# Altium PCB sx1278.PcbDoc
Units mil, origin at the board's own origin, x right, y up, seen from the top; angles counter-clockwise.
Board outline 1220 x 2120 mil, 2 copper layers (Top Layer, Bottom Layer); 24 components, 38 nets, 140 pads, 49 vias.
Unrouted connection lines stored in the file: 1.
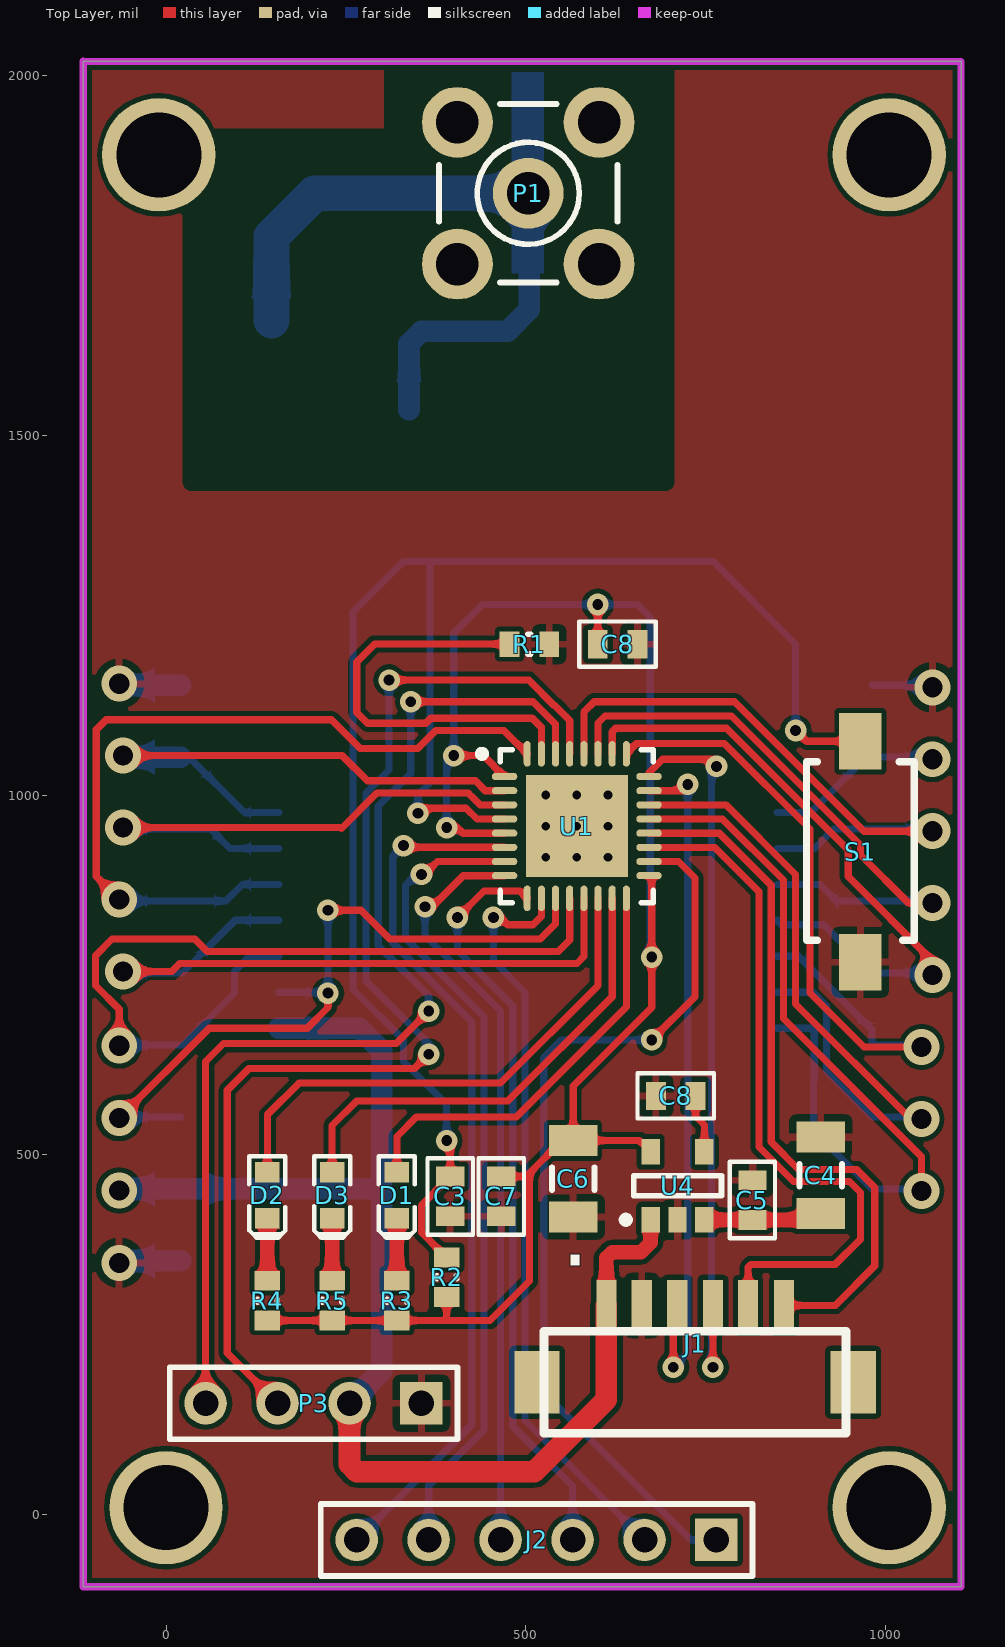
[diagram p0: Top Layer view]
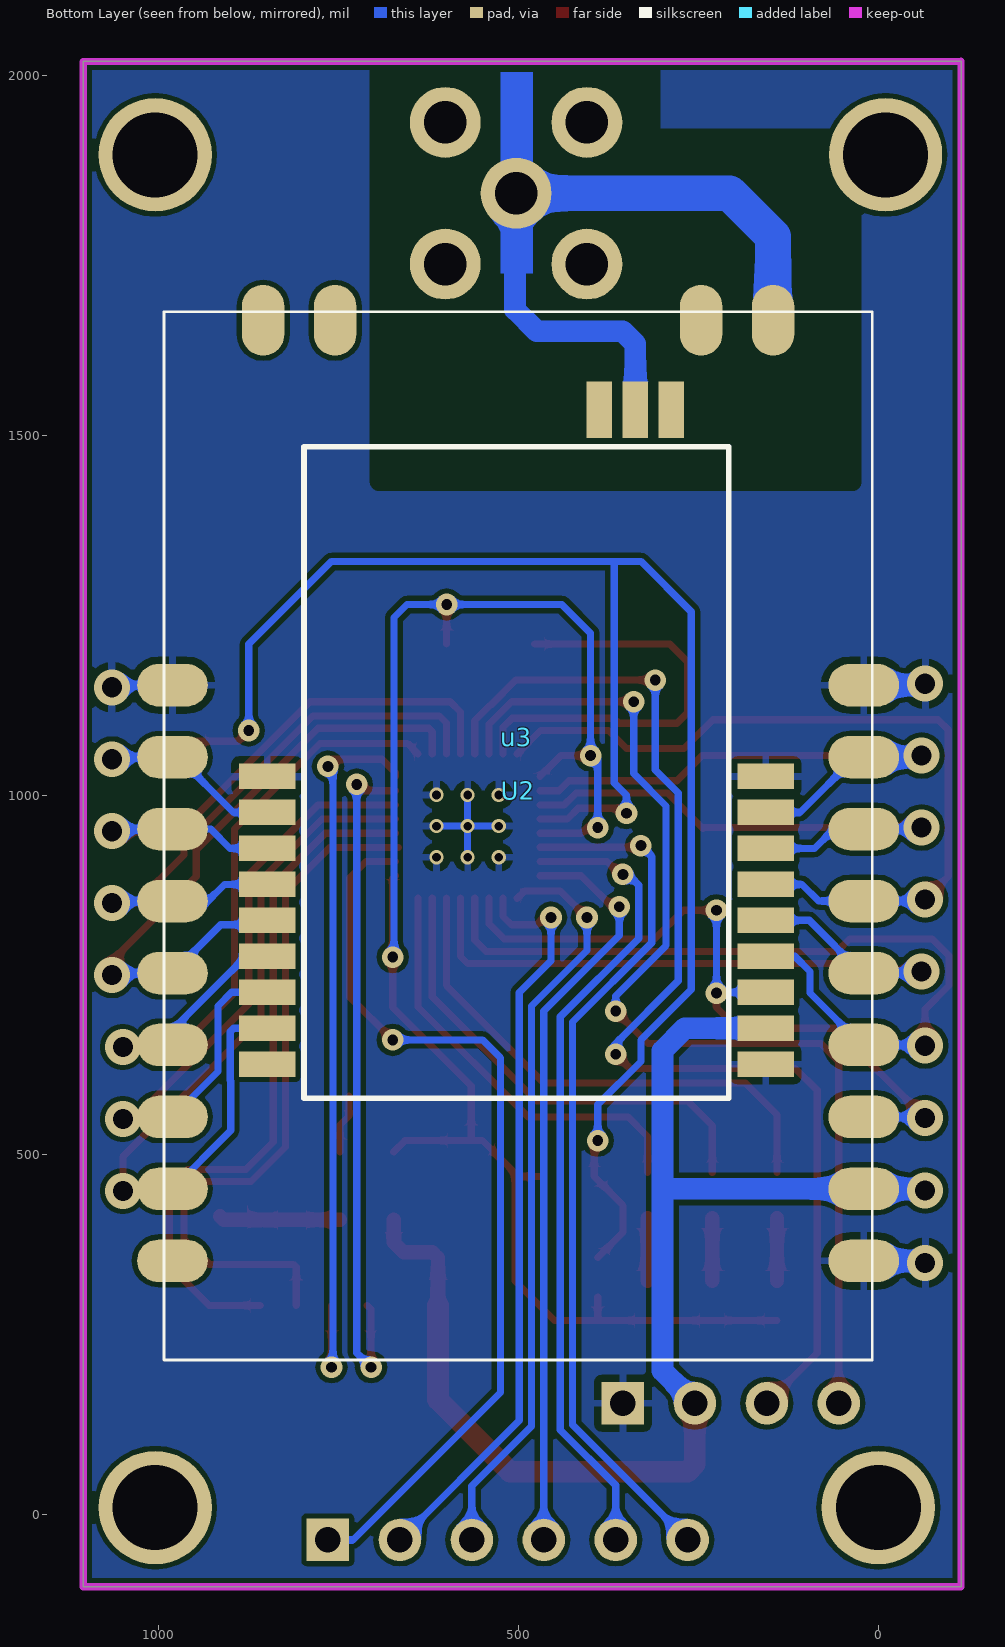
[diagram p1: Bottom Layer view, seen from below]

## Layer stack, top to bottom
Top Solder: solder mask 0.4, Solder Resist, Dk 3.5
Top Layer: signal copper 1.4
Dielectric1: dielectric 12.6, FR-4, Dk 4.8
Bottom Layer: signal copper 1.4
Bottom Solder: solder mask 0.4, Solder Resist, Dk 3.5

## Board outline
-115,-100 -115,2020 -114.69,2019.69 1105,2019.69 1105,-100

## Design rules (kind name [scope] priority, off if disabled: settings)
Clearance [All] p1: gap=7 ignorepadtopadclearanceinfootprint=FALSE
PolygonConnect [All] p1: connectstyle=Relief reliefconductorwidth=10 reliefentries=4 polygonreliefangle="90 Angle" airgapwidth=10
RoutingVias [All] p1: holewidth=28 width=50 viastyle="Through Hole" minholewidth=28 minwidth=50 maxholewidth=28 maxwidth=50
SilkToSolderMaskClearance SilkscreenOverComponentPads [IsPad] p1: minsilkscreentomaskgap=10 clearancetoexposedcopper=TRUE
SolderMaskExpansion [All] p1: expansion=4
Width [All] p1: maxlimit=50 minlimit=6 preferedwidth=10
29 further rules are at their usual default settings.

## Components (designator, comment, footprint, x,y, rotation, side; value= is the part's Value field where it differs from the comment)
C3 "Cap_0603" 0603AC 395,470 r270 top value=?F
C4 "Cap_0603" C1206 910,471.85 r270 top value=?F
C5 "Cap_0603" 0603AC 815,465 r270 top value=?F
C6 "Cap_0603" C1206 565.84,467.09 r90 top value=?F
C7 "Cap_0603" 0603AC 465.84,414.92 r90 top value=?F
C8 "Cap_0603" 0603AC 655.12,1210 r180 top value=?F
C8 "Cap_0603" 0603AC 680.72,582.09 r0 top value=?F
D1 "Status" LED_0603_BLUE 320.84,444.09 r270 top
D2 "PWR" LED_0603_GREEN 140.84,444.09 r270 top value="2.1v 20mA"
D3 "RX" LED_0603_YELLOW 230.84,444.09 r270 top value="2.1v 20mA"
J1 "CON6" DF13C-6P-1.25V 735,255 r0 top
J2 "CON6" HDR1X6 765,-35 r180 top
P1 "SMB" SMB_V-RJ45 503.43,1836.57 r0 top
P3 "HDR1x4_1.27" HDR1X4 355,155 r180 top
R1 "2R94 1% 0603(1608)" RESC0603(1608)_L 505,1210 r180 top value="2.94 Ohm"
R2 "2R94 1% 0603(1608)" RESC0603(1608)_L 390,330 r270 top value="2.94 Ohm"
R3 "2R94 1% 0603(1608)" RESC0603(1608)_L 320.84,297.64 r90 top value="2.94 Ohm"
R4 "2R94 1% 0603(1608)" RESC0603(1608)_L 140.84,297.64 r90 top value="2.94 Ohm"
R5 "2R94 1% 0603(1608)" RESC0603(1608)_L 230.84,297.64 r90 top value="2.94 Ohm"
S1 "ButtonTACT_3x6x2.5_180" 按键-贴片 965,1075 r270 top
U1 "STM32F050K6U6A" UFQFPN32_M 570.84,957.09 r0 top
U2 "sx1278" SPI-E19-433MS1W 500.67,943.46 r90 bottom locked
u3 "sx1278100mw" "PCBComponent_1 - duplicate" 510,1050 r90 bottom locked
U4 "LP2992-3.3" SOT23-5L 710.84,457.24 r90 top

## Footprints (in the part's own frame and the unit in brackets; to place one, negate y for a bottom-side part, rotate by r counter-clockwise, add the part's x,y. Pads: shape width x height; smd on the part's side, far side on the other; paste and mask are expansions set on the pad)
0603AC [mm]
  rect 0.7x1 smd: 1(0,0) 2(1.4,0)
  silkscreen extent -0.65,-0.8 2.05,0.8, body extent -0.09,-0.38 1.51,0.42, height 0.3
C1206 [mm] "Chip Capacitor, Body 3.2x1.6mm, IPC High Density"
  rect 1.1x1.7 smd: 1(-1.35,0) 2(1.35,0)
  silkscreen extent -0.4,-0.75 0.4,0.75, body extent -1.7,-0.9 1.7,0.9, height 1.3
DF13C-6P-1.25V [mil] "DF13C-6P-1.25V"
  rect 28x71 smd: 1(-123.03,36) 2(-73.82,36) 3(-24.61,36) 4(25,36) 5(74,36) 6(124,36)
  rect 63x87 smd: M$0(220,-70.87) M$1(-219.49,-70.87)
  silkscreen extent -210,-142 210,0
HDR1X4 [mm] "Connector; Header; 4 Position"
  rect 1.5x1.5 hole 0.9: 1(0,0)
  round 1.5 hole 0.9: 2(2.54,0) 3(5.08,0) 4(7.62,0)
  silkscreen extent -1.27,-1.27 8.89,1.27
HDR1X6 [mm] "Connector; Header; 6 Position"
  rect 1.5x1.5 hole 0.9: 1(0,0)
  round 1.5 hole 0.9: 2(2.54,0) 3(5.08,0) 4(7.62,0) 5(10.16,0) 6(12.7,0)
  silkscreen extent -1.27,-1.27 13.97,1.27
LED_0603_BLUE [mil]
  rect 28x34 smd: 1(-32,0) 2(32,0)
  Top Layer pour cut-out: -18,17 18,17 18,-17 -18,-17
  silkscreen extent -54,-25 59,25, body extent -31,-16 32,16, height 30
LED_0603_GREEN [mil]
  rect 28x34 smd: 1(-32,0) 2(32,0)
  Top Layer pour cut-out: -18,17 18,17 18,-17 -18,-17
  silkscreen extent -54,-25 59,25, body extent -31,-16 32,16, height 30
LED_0603_YELLOW [mil]
  rect 28x34 smd: 1(-32,0) 2(32,0)
  Top Layer pour cut-out: -18,17 18,17 18,-17 -18,-17
  silkscreen extent -54,-25 59,25, body extent -31,-16 32,16, height 30
"PCBComponent_1 - duplicate" [mm]
  rect 0.9x2 smd: 1(-0.607,8.623) 2(-1.877,8.623) 3(-3.147,8.623) 4(-4.417,8.623) 5(-5.687,8.623) 6(-6.957,8.623) 7(-8.227,8.623) 8(-9.497,8.623) 9(-10.767,8.623) 10(-10.767,-8.977) 11(-9.497,-8.977) 12(-8.227,-8.977) 13(-6.957,-8.977) 14(-5.687,-8.977) 15(-4.417,-8.977) 16(-3.147,-8.977) 17(-1.877,-8.977) 18(-0.607,-8.977)
  rect 2x0.9 smd: 19(12.333,-5.647) 20(12.333,-4.377) 21(12.333,-3.107)
  silkscreen extent -11.97,-7.68 11.03,7.32
RESC0603(1608)_L [mm] "Chip Resistor, Body 1.6x0.8mm, IPC High Density"
  rect 0.7x0.9 smd: 1(-0.7,0) 2(0.7,0)
  silkscreen extent -0.05,-0.35 0.05,0.35, body extent -0.85,-0.47 0.85,0.47, height 0.6
SMB_V-RJ45 [mm] "Connector; SMB Straight"
  round 2.5 hole 1.5: 1(0,0) 2(-2.5,-2.5) 2(-2.5,2.5) 2(2.5,-2.5) 2(2.5,2.5)
  silkscreen extent -3.15,-3.15 3.15,3.15
SOT23-5L [mm] "SOT23, 5-Leads, Body 2.9x1.6mm, Pitch 0.95mm, Lead Span 2.8mm, IPC High Density"
  rect 0.9x0.65 smd mask+0.076: 1(-1.2,0.95) 2(-1.2,0) 3(-1.2,-0.95) 4(1.2,-0.95) 5(1.2,0.95)
  silkscreen extent -1.32,-1.55 0.35,1.95, body extent -1.17,-1.46 1.17,1.46, height 0.97
SPI-E19-433MS1W [mm]
  oval 1.5x2.5 smd: 1(5.32,12.2) 2(2.78,12.2) 3(0.24,12.2) 4(-2.3,12.2) 5(-4.84,12.2) 6(-7.38,12.2) 7(-9.92,12.2) 8(-12.46,12.2) 9(-15,12.2) 10(-15,-12.2) 11(-12.46,-12.2) 12(-9.92,-12.2) 13(-7.38,-12.2) 14(-4.84,-12.2) 15(-2.3,-12.2) 16(0.24,-12.2) 17(2.78,-12.2) 18(5.32,-12.2)
  oval 2.5x1.5 smd: 19(18.2,-9) 20(18.2,-6.46) 21(18.2,6.46) 22(18.2,9)
  silkscreen extent -18.5,-12.5 18.5,12.5
UFQFPN32_M [mm] "QFN, 32-Leads, Body 5x5mm, Pitch 0.5mm, Thermal Pad 3.6x3.6mm, IPC Low Density"
  oval 0.9x0.25 smd: 1(-2.55,1.75) 2(-2.55,1.25) 3(-2.55,0.75) 4(-2.55,0.25) 5(-2.55,-0.25) 6(-2.55,-0.75) 7(-2.55,-1.25) 8(-2.55,-1.75) 17(2.55,-1.75) 18(2.55,-1.25) 19(2.55,-0.75) 20(2.55,-0.25) 21(2.55,0.25) 22(2.55,0.75) 23(2.55,1.25) 24(2.55,1.75)
  oval 0.25x0.9 smd: 9(-1.75,-2.55) 10(-1.25,-2.55) 11(-0.75,-2.55) 12(-0.25,-2.55) 13(0.25,-2.55) 14(0.75,-2.55) 15(1.25,-2.55) 16(1.75,-2.55) 25(1.75,2.55) 26(1.25,2.55) 27(0.75,2.55) 28(0.25,2.55) 29(-0.25,2.55) 30(-0.75,2.55) 31(-1.25,2.55) 32(-1.75,2.55)
  rect 3.6x3.6 smd: 33(0,0)
  silkscreen extent -3.47,-2.7 2.7,2.7, body extent -2.55,-2.55 2.55,2.55, height 0.6
按键-贴片 [mm]
  rect 2x1.5 smd: 1(0,0) 2(7.8,0)
  silkscreen extent 0.73,-1.9 7.03,1.9, body extent -0.06,-1.94 7.83,1.91, height 2.5

## Part data
C3 C4 C5 C6 C7 C8 C8: "Capacitor"
D1: library part "LED 603 Bl", "Blue 603 LED", Supplier Part Number 1=350-2037-1-ND, Supplier 1=Digi-Key
D2: library part "LED 603 Gr", "Green 603 LED", Supplier Part Number 1=754-1116-1-ND, Supplier 1=Digi-Key
D3: library part "LED 603 Or", "Orange 603 LED", Supplier Part Number 1=754-1120-1-ND, Supplier 1=Digi-Key
J1 J2: "Connector"
P1: "SMB Straight Connector", LatestRevisionDate=17-Jul-2002, LatestRevisionNote="Re-released for DXP Platform.", Publisher="Altium Limited"
P3: "Header"
R1 R2 R3 R4 R5: library part CMP-1012-00222-1, "2R94 0.1W 1% 0603 (1608 Metric)  SMD", Case-EIA=0603, Case-Metric=1608, Power="0.1 W", Tolerance="1 %", Technology=SMT
S1: "Button"
U1: "ARM Cortex-M0 32-bit RISC core (48 MHz max), 32kB Flash, 4 kB Internal RAM, 27 High Current I/Os, -40 to +85癈, 32-Pin UFQFPN, Tray", Supply Current(Icc) (Lowest power mode) typ (礎)=1.65, Supply Current(Icc) (Run mode (per Mhz)) typ (礎)=250, 16-bit timers (IC/OC/PWM)=5x16-bit, 32-bit timer (IC/OC/PWM)=1x32-bit, A/D Converter=10x12-bit, ComponentLink1Description="Manufacturer URL", ComponentLink1URL=http://www.st.com/, ComponentLink2Description=Datasheet, ComponentLink2URL=http://www.st.com/internet/com/TECHNICAL_RESOURCES/TECHNICAL_LITERATURE/DATA_BRIEF/DM00047078.pdf, ComponentLink3Description="STM32F0 Web Page", ComponentLink3URL=http://www.st.com/internet/mcu/subclass/1588.jsp, DatasheetVersion="rev2, Feb-2012", Other timer functions="2 x WDG, RTC, 24-bit down counter", PackageDescription="32-Pin Ultra Thin Fine Pitch Quad Flat No-Lead, 5 x 5 X 0.6 mm Body, 0.5 mm Pitch, Exposed Pad", PackageReference=UFQFPN32, PackageVersion=2010, Serial Interface="1xSPI;1xI2S;1xI2C;1xUSART(IrDA, ISO 7816)"
U4: library part LP2985-3.3, "3.3V 250mA LDO Regulator", Current - Limit (Min)=-, Current - Output=250mA, Manufacturer="National Semiconductor", Manufacturer Part Number=LP2992AIM5-3.3/NOPB, Operating Temperature="-40癈 ~ 125癈", Package / Case="SC-74A, SOT-753", Supplier Device Package=SOT-23-5, Supplier Part Number 1=LP2992AIM5-3.3CT-ND, Voltage - Dropout (Typical)="0.45V @ 250mA", Voltage - Input="Up to 16V", Voltage - Output=3.3V, Category="Integrated Circuits (ICs)", ComponentLink1Description=http://www.national.com/ds/LP/LP2992.pdf, ComponentLink1URL=http://www.national.com/ds/LP/LP2992.pdf, Mounting Type="Surface Mount", Number of Regulators=1, Packaging="Cut Tape (CT)", Pricing 1="1=1.86, 25=1.4712, 100=1.3239, 250=1.15224, 500=1.02966 (AUD)", Regulator Topology="Positive Fixed", RoHS="RoHS Compliant", Stock 1=15821, Supplier 1=Digi-Key

## Free pads (board coordinates)
  round 157.48 hole 118.11: 1(1005,1890) 2(-10,1890) 3(0,10) 4(1005,10)

## Via types
v1: diameter 30, hole 15, Top Layer to Bottom Layer, 23 vias
v2: diameter 50, hole 28, Top Layer to Bottom Layer, 17 vias
v3: diameter 19.68, hole 12, Top Layer to Bottom Layer, 8 vias
v4: diameter 20, hole 12, Top Layer to Bottom Layer, 1 vias

## Nets (pads, with @x,y where several pads share a name; then routed paths per layer and width w, separated by ;. In a path a pad name is that pad's centre, name@x,y a point inside that pad or via, vN(x,y) a via of type N, cw(c..) or ccw(c..) an arc to the next point about the centre after c; other vN are vias at no path point)
ADC_IN0: J2.6 U1.6 | length 1211.1
  Top Layer w10: v1@342.44,927.56 U1.6
  Bottom Layer w10: J2.6 425,125 425,685 315,795 315,915 v1(330,930)
ADC_IN1: J2.5 U1.7 | length 1144.1
  Top Layer w10: v1(355,890) 355,885.75 377.13,907.87 U1.7
  Bottom Layer w10: v1(355,890) 348,890 333,875 333,801.04 442,692.04 442,117.96 365,40.96 J2.5
ADC_IN2: J2.4 U1.8 | length 1063
  Top Layer w10: v1(360,845) 365,840 413.19,888.19 U1.8
  Bottom Layer w10: v1(360,845) 355,845 360,840 360,805 465,700 J2.4
ADC_IN3: J2.3 U1.9 | length 1047.8
  Top Layer w10: v1(405,830) 442,867 491.64,867 U1.9
  Bottom Layer w10: v1(405,830) 405,784.04 482,707.04 482,123 565,40 J2.3
ADC_IN4: J2.2 U1.10 | length 1052.6
  Top Layer w10: v1(455,830) 465,830 475,820 510,820 521.63,831.63 U1.10
  Bottom Layer w10: v1(455,830) 455,770 499,726 499,131 J2.2
ANT: P1.1 U2.19 u3.20 | length 939.7
  Bottom Layer w30: u3.20 337.68,1627.68 355,1645 475,1645 505,1675 505,1835 P1.1
  Bottom Layer w50: U2.19 146.34,1776.34 206.57,1836.57 P1.1
DIO0: U1.22 U2.7 u3.7 | length 1016.1
  Top Layer w10: U1.22 778.39,986.61 875,890 875,710 1035,550 v2(1050,550)
  Bottom Layer w10: u3.7 898.9,726.1 917.86,707.14 917.86,616.04 U2.7 1062.09,552.91 1059.17,550 v2(1050,550)
DIO1: U1.25 U2.6 u3.6 | length 1013.8
  Top Layer w10: U1.25 654.26,1072 775.88,1072 895,952.88 895,725 970,650 v2(1050,650)
  Bottom Layer w10: u3.6 878.9,776.1 980.98,674.02 U2.6 1062.09,652.91 1059.17,650 v2(1050,650)
DIO2: U1.26 U2.5 u3.5 | length 907.1
  Top Layer w10: U1.26 620.06,1088.06 625,1093 778.92,1093 948,923.92 948,887 1065,770 v2(1065,750) v2@1060,755
  Bottom Layer w10: u3.5 855.59,820 913.9,820 U2.5 1062.09,752.91 v2(1065,750)
DIO3: U1.27 U2.4 u3.4 | length 853.7
  Top Layer w10: U1.27 600.37,1100.37 610,1110 785.96,1110 965,930.96 965,917.09 1032.09,850 v2(1065,850)
  Bottom Layer w10: u3.4 908.9,876.1 932.09,852.91 U2.4 1062.09,852.91 v2(1065,850)
DIO4: U1.28 U2.3 u3.3 | length 850.8
  Top Layer w10: U1.28 580.69,1115.69 595,1130 790,1130 970,950 v2(1065,950)
  Bottom Layer w10: u3.3 901.1,926.1 927.91,952.91 U2.3 1062.09,952.91 v2(1065,950)
DIO5: U2.2 u3.2 | length 248.5
  Bottom Layer w10: u3.2 896.1,976.1 972.91,1052.91 U2.2 1062.09,1052.91 v2(1065,1050)
GND: C3.2 C4.1 C5.1 C6.1 C7.1 C8.1 J1.2 P3.1 R1.1 S1.2 U1.33 U2.1 U2.10 U2.18 u3.1 u3.10 u3.18 U4.2 | length 431.2
  Bottom Layer w10: v3(527.54,957.09) v3(570.84,957.09) ; v3(570.84,913.78) v3(570.84,957.09) ; v3(570.84,1000.39) v3(570.84,957.09) ; v3(614.15,957.09) v3(570.84,957.09) ; U2.1 1062.09,1152.91 v2(1065,1150)
  Bottom Layer w30: v2(-65,350) -62.09,352.91 U2.10 ; v2(-65,1155) -62.91,1152.91 U2.18
  other v3: 527.54,913.78 614.15,913.78 527.54,1000.39
  other v4: 614.15,1000.39
I2C1_SCL: P3.3 U1.29 | length 1654.7
  Top Layer w10: P3.3 85,225 85,590 115,620 345,620 v1(365,640) ; v1(310,1160) 504.04,1160 539.54,1124.5 540.5,1124.5 561,1104 U1.29
  Bottom Layer w10: v1(310,1160) 310,1035 278,1003 278,742 365,655 v1(365,640)
I2C1_SDA: P3.4 U1.30 | length 1547.1
  Top Layer w10: P3.4 55,630 80,655 320,655 v1(365,700) ; v1(340,1130) 510,1130 541.32,1098.68 U1.30
  Bottom Layer w10: v1(340,1130) 340,1030 295,985 295,790.96 365,720.96 v1(365,700)
LED0: D1.1 U1.16 | length 594.1
  Top Layer w10: D1.1 320.84,525.84 348,553 487.04,553 639.74,705.7 U1.16
LED1: D2.1 U1.14 | length 735
  Top Layer w10: D2.1 140.84,555.84 185,600 465,600 600.37,735.37 U1.14
LED2: D3.1 U1.15 | length 664.8
  Top Layer w10: D3.1 230.84,540.84 265,575 475,575 620.06,720.06 U1.15
NetC8_2: C8.2@735.84,582.09 U4.4 | length 82.7
  Top Layer w10: C8.2@735.84,582.09 735.84,554.16 748.24,541.76 U4.4
NetD1_2: D1.2 R3.2 | length 86.9
  Top Layer w20: R3.2 D1.2
NetD2_2: D2.2 R4.2 | length 86.9
  Top Layer w20: R4.2 D2.2
NetD3_2: D3.2 R5.2 | length 86.9
  Top Layer w20: R5.2 D3.2
NetR1_2: R1.2 U1.31 | length 600.6
  Top Layer w10: R1.2 290,1210 265,1185 265,1115 280,1100 360.96,1100 367.96,1107 508.96,1107 521.63,1094.33 U1.31
NRST: C3.1 R2.1 S1.1 U1.4 | length 2379.7
  Top Layer w10: v1(350,975) 357,982 417.04,982 432.11,966.93 U1.4 ; R2.1 355,392.56 355,430 C3.1 395,515 v1(390,520) ; v1(875,1090) 890,1075 S1.1
  Bottom Layer w10: v1(350,975) 350,1000 367,1017 367,1323 365,1325 ; v1(390,520) 390,570 330,630 330,660 260,730 260,1255 330,1325 365,1325 ; v1(875,1090) 875,1210 760,1325 365,1325
PB1: J2.1 U1.18 | length 1273.4
  Top Layer w10: U1.18 712.13,907.87 735,885 735,720 v1(675,660)
  Bottom Layer w10: v1(675,660) 550,660 525,635 525,170 730,-35 J2.1
RES: U1.21 U2.8 u3.8 | length 1133.5
  Top Layer w10: U1.21 773.07,966.93 858,882 858,689.67 1050,497.67 v2(1050,450)
  Bottom Layer w10: u3.8 896.1,676.1 900.86,671.35 900.86,603.42 900,602.56 900,533.9 U2.8 1062.09,452.91 1059.17,450 v2(1050,450)
RFRX: U1.2 U2.17 u3.17 | length 807
  Top Layer w10: v2(-60,1055) 245,1055 280,1020 430,1020 443.7,1006.3 U1.2
  Bottom Layer w10: U2.17 32.09,1052.91 108.9,976.1 u3.17
  Bottom Layer w30: v2(-60,1055) -61.45,1055 -63.54,1052.91 U2.17
RFTX: U1.3 U2.16 u3.16 | length 795
  Top Layer w10: v2(-60,955) 242.5,955 243.75,953.75 293,1003 420,1003 424,999 424.08,999 436.47,986.61 U1.3
  Bottom Layer w10: v2(-60,955) -62.08,955 -64.16,952.91 U2.16 62.09,952.91 88.9,926.1 u3.16
SPI1_cs: U1.32 U2.15 u3.15 | length 1126.4
  Top Layer w10: v2(-65,855) -97,887 -97,1091 -83,1105 230,1105 270,1065 350,1065 375,1090 469.43,1090 U1.32
  Bottom Layer w10: v2(-65,855) -62.91,852.91 U2.15 82.91,852.91 106.1,876.1 u3.15
SPI1_MISO: U1.12 U2.13 u3.13 | length 1169.5
  Top Layer w10: v2(-65,651.88) -65,702.67 -98,735.67 -98,777 -75,800 40,800 57,783 545.37,783 561,798.63 U1.12
  Bottom Layer w10: v2(-65,651.88) -63.96,652.91 U2.13 22.91,652.91 95,725 95,755 116.1,776.1 u3.13
SPI1_MOSI: U1.13 U2.14 u3.14 | length 983.8
  Top Layer w10: v2(-60,755) 8,755 19,766 571,766 580.69,775.69 U1.13
  Bottom Layer w10: v2(-60,755) -60.83,755 -62.91,752.91 U2.14 22.91,752.91 96.1,826.1 u3.14
SPI1_SCK: U1.11 U2.12 u3.12 | length 1037.9
  Top Layer w10: v2@-65,565 v2(-65,551.25) 60,676.25 196.25,676.25 225,705 v1(225,725) ; v1(225,840) 271,840 311,800 520,800 541.32,821.32 U1.11
  Bottom Layer w10: v2(-65,551.25) -63.34,552.91 U2.12 ; u3.12 v1@228.9,726.1 ; v1(225,725) v1(225,840)
SWCLK: J1.4 U1.24 | length 1035.7
  Top Layer w10: U1.24 671.24,1031.24 690,1050 755,1050 v1(765,1040) ; v1(760,205) J1.4
  Bottom Layer w10: v1(760,205) 758,207 758,1033 v1(765,1040)
SWDIO: J1.3 U1.23 | length 963.9
  Top Layer w10: U1.23 716.3,1006.3 v1(725,1015) ; v1(705,205) 705,285.61 J1.3
  Bottom Layer w10: v1(705,205) 725,225 v1(725,1015)
USART1_RX: J1.6 U1.20 | length 984.5
  Top Layer w10: U1.20 768.71,947.24 841,874.96 841,518.04 879.04,480 960,480 985,455 985,346 930,291 J1.6
USART1_TX: J1.5 U1.19 | length 994.8
  Top Layer w10: U1.19@666.96,927.48 762.52,927.48 824,866 824,511 872,463 950,463 965,448 965,383 930,348 813,348 809,344 J1.5
V5: C4.2 C5.2 J1.1 P3.2 U2.11 u3.11 U4.1 U4.3 | length 1989.2
  Top Layer w20: J1.1 611.97,356.97 620,365 660,365 673.44,378.44 U4.1 ; U4.3 829.88,410 830,409.88 909.88,409.88 C4.2@915,415
  Top Layer w30: P3.2 255,70 265,60 511.97,60 611.97,160 J1.1
  Bottom Layer w30: v2(-65,450.62) -62.71,452.91 U2.11 292.91,452.91 300,460 ; u3.11 268.9,676.1 300,645 300,460 ; P3.2 300,200 300,460
VCC: C6.2 C7.2 C8.2@600,1210 R2.2 R3.1 R4.1 R5.1 U1.1 U1.5 U1.17 U4.5 | length 2485.9
  Top Layer w10: R4.1 R5.1 R3.1 385.46,270.08 ; R2.2 390,274.62 385.46,270.08 ; v1(390,955) 405,955 412.76,947.24 U1.5 ; v1(400,1055) 441.43,1055 U1.1 ; C7.2 500.04,470.04 505,475 ; C8.2@600,1210 v1(600,1265) ; U1.17 675,884.43 v1(675,775) 675,705 565.84,595.84 C6.2 ; U4.5 657.69,520.24 C6.2 ; 385.46,270.08 450.08,270.08 505,325 505,475 ; 505,475 550.24,520.24 C6.2
  Bottom Layer w10: v1(390,955) 390,1045 v1(400,1055) 400,1225 440,1265 v1(600,1265) 655,1265 673,1247 673,777 v1(675,775)
pads on no net: J1.M$0 J1.M$1 P1.2 U2.9 U2.20 U2.21 U2.22 u3.9 u3.19 u3.21

## Polygon pours and split planes (outlines as drawn)
GND on Top Layer "Top Layer-No Net" (solid, remove dead copper, pour order 16): -155,2100 -115,2060 1165,2060 1165,-70 1085,-150 -175,-150 -175,-75 -155,-55 -155,2060 -110,2060 -105,2065
GND on Bottom Layer "Top Layer-No Net" (solid, remove dead copper, pour order 18): -115,2085 -75,2045 1165,2045 1165,-145 1160,-140 -170,-140 -220,-90 -170,-40 -170,2025 -150,2025 -115,2060 -105,2050 -65,2050

## Keep-outs
Keep-Out Layer:
  lines w10: -115,-100 1105,-100 1105,2019.69 -14.69,2019.69 -110.31,2019.69 -114.69,2019.69 -115,2020 -115,2015 -115,-100

## Other copper
Bottom Layer:
  rectangle net ANT: 480,1725 525,2005

## Silkscreen, mask and mechanical layers (free items; w line width, h text height)
Top Solder:
  rectangle: 480,1725 525,2005